# Altium PCB ZENDER.PcbDoc
Units mil, origin at the board's own origin, x right, y up, seen from the top; angles counter-clockwise.
Board outline 1955 x 1260 mil, 2 copper layers (Top Layer, Bottom Layer); 10 components, 46 nets, 36 pads, 3 vias.
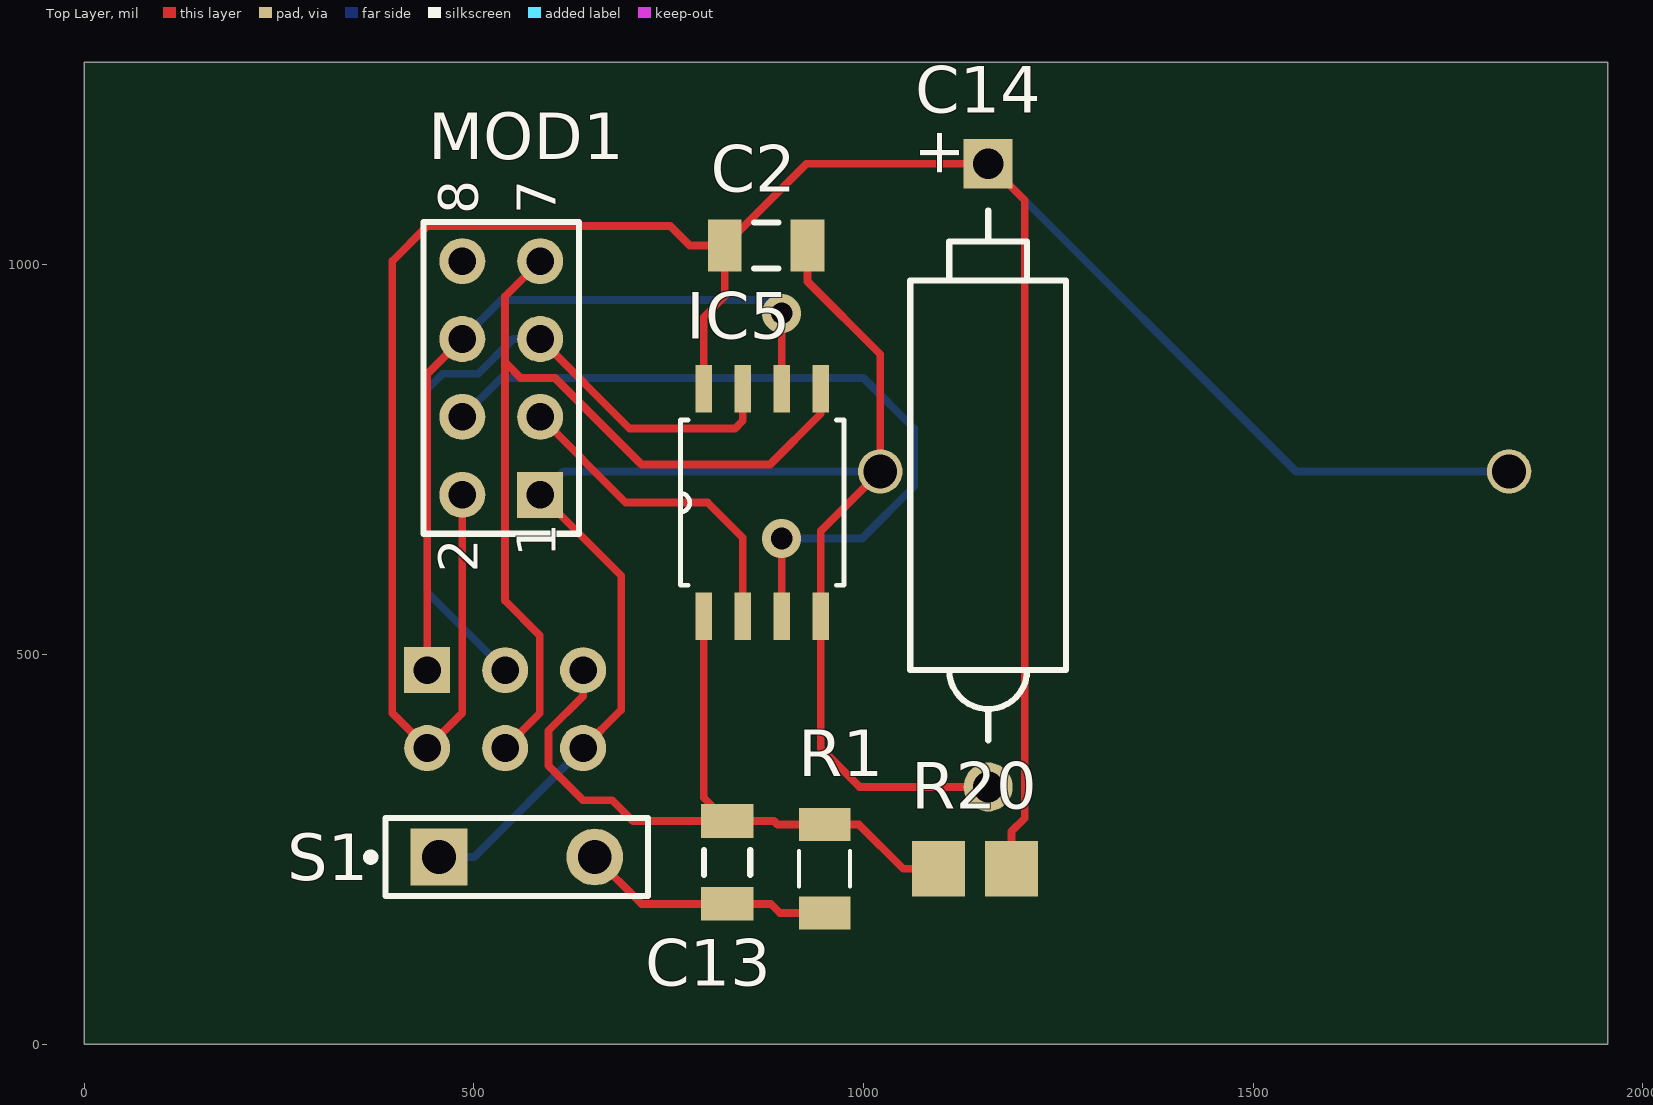
[diagram p0: Top Layer view]
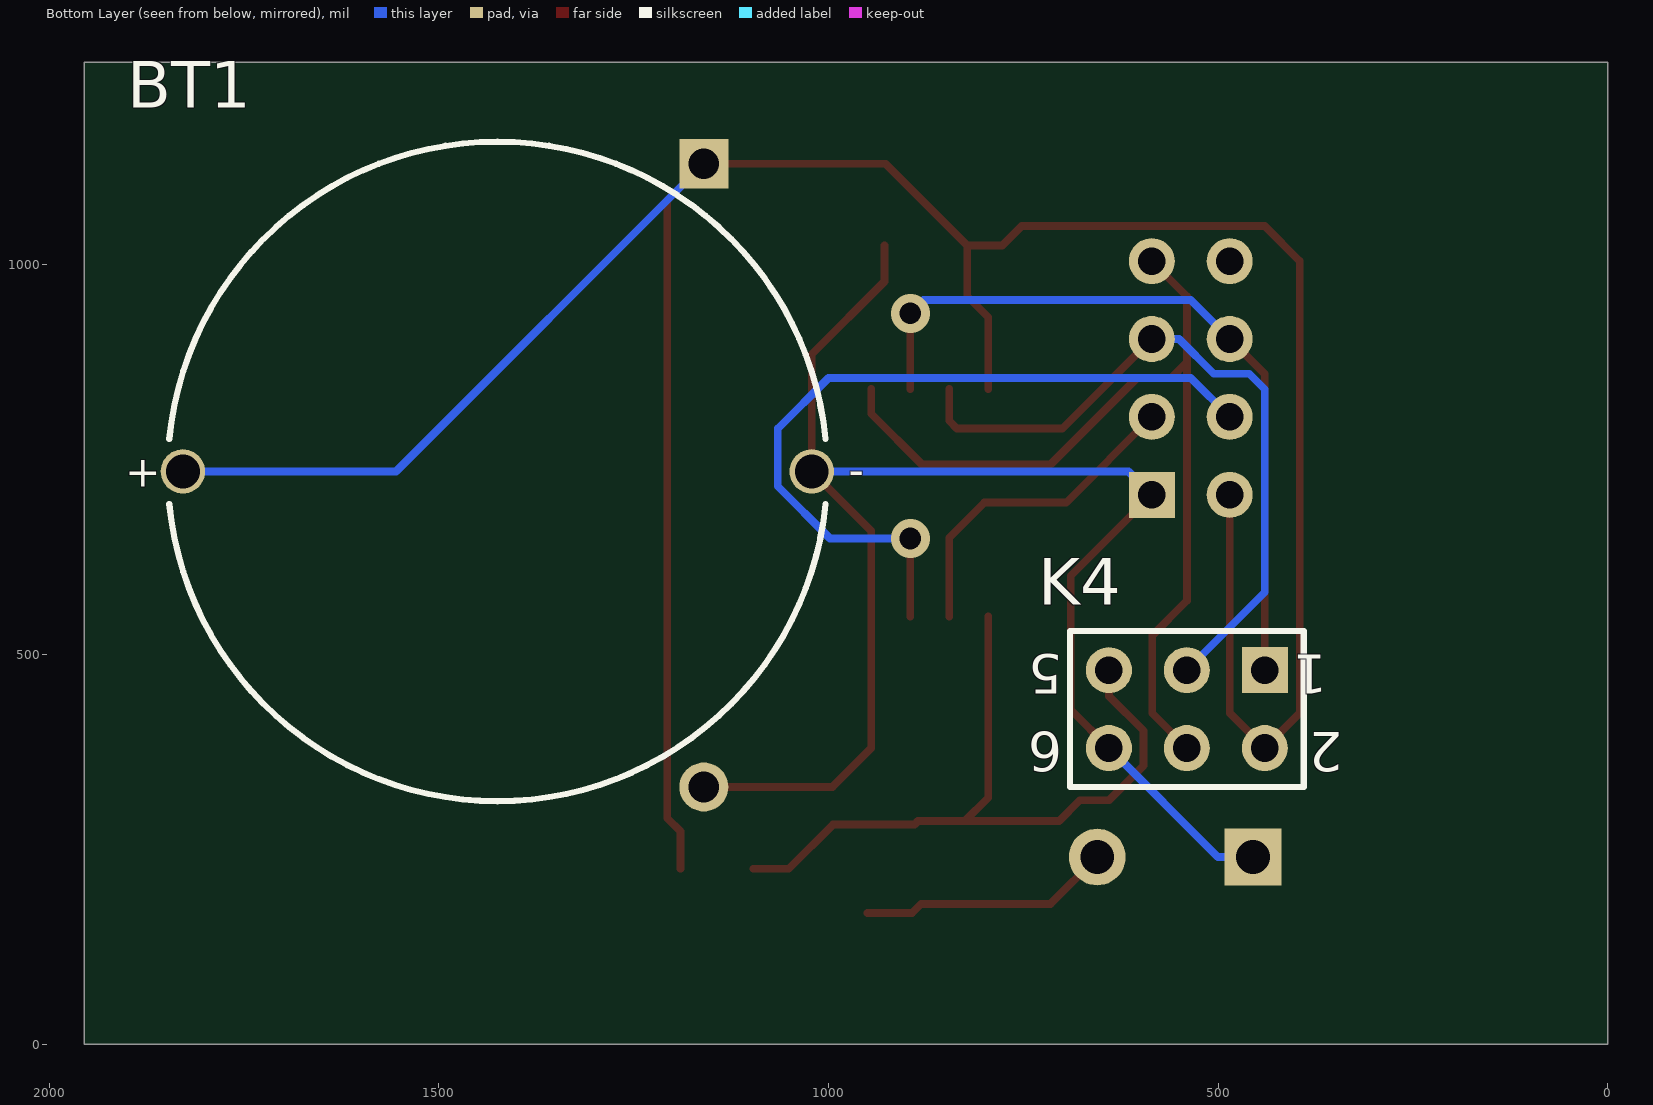
[diagram p1: Bottom Layer view, seen from below]

## Layer stack, top to bottom
Top Solder: solder mask 0.4, Solder Resist, Dk 3.5
Top Layer: signal copper 1.4
Dielectric 1: dielectric 12.6, FR-4, Dk 4.8
Bottom Layer: signal copper 1.4
Bottom Solder: solder mask 0.4, Solder Resist, Dk 3.5

## Board outline
0,0 1955,0 1955,1260 0,1260

## Design rules (kind name [scope] priority, off if disabled: settings)
Clearance [All] p1: gap=10 ignorepadtopadclearanceinfootprint=FALSE except(0: Arc-Hole Track-Hole SMDPad-Hole THPad-Hole Via-Hole Fill-Hole Poly-Hole Region-Hole Text-Hole)
PolygonConnect [All] p1: connectstyle=Relief reliefconductorwidth=10 reliefentries=4 polygonreliefangle="90 Angle" airgapwidth=10
RoutingVias [All] p1: holewidth=28 width=50 viastyle="Through Hole" minholewidth=28 minwidth=50 maxholewidth=28 maxwidth=50
SolderMaskExpansion [All] p1: expansion=4 istentingtop=FALSE
Width [All] p1: maxlimit=10 minlimit=10 preferedwidth=10
30 further rules are at their usual default settings.

## Components (designator, comment, footprint, x,y, rotation, side; value= is the part's Value field where it differs from the comment)
BT1 "CR-2032" PANA-CR-2032HFN 1425,735 r180 bottom
C2 "Cap Semi" C1206 875,1025 r180 top value=100nF
C13 "Cap Semi" C1206 825,233.15 r90 top value=100nF
C14 "Cap Pol2" POLAR0.8 1160,730 r90 top value=100nF
IC5 "ATtiny85" *SOIC127P798X216-8N 870,695 r90 top
K4 "ATMEL ISP" HDR2X3 440,480 r0 bottom
MOD1 "NRF24L01+" HDR2X4 585,705 r90 top
R1 "Res2" *RESC3115X70N 950,225 r270 top value=10K
R20 "Res2" *RESC3216X55N 1143.15,225 r180 top value=6k8
S1 "SW-PB" SPST-2 555,240 r0 top

## Footprints (in the part's own frame and the unit in brackets; to place one, negate y for a bottom-side part, rotate by r counter-clockwise, add the part's x,y. Pads: shape width x height; smd on the part's side, far side on the other; paste and mask are expansions set on the pad)
*RESC3115X70N [mm]
  rect 1.08x1.68 smd: 1(-1.445,0) 2(1.445,0)
  silkscreen extent -0.58,-0.83 0.58,0.83
*RESC3216X55N [mm]
  rect 1.74x1.82 smd: 1(-1.19,0) 2(1.19,0)
*SOIC127P798X216-8N [mil]
  rect 61x21 smd: 1(-146,75) 2(-146,25) 3(-146,-25) 4(-146,-75) 5(146,-75) 6(146,-25) 7(146,25) 8(146,75)
  silkscreen extent -106,-105 106,105
C1206 [mm] "Chip Capacitor, Body 3.2x1.6mm, IPC High Density"
  rect 1.1x1.7 smd: 1(-1.35,0) 2(1.35,0)
  silkscreen extent -0.4,-0.75 0.4,0.75, body extent -1.7,-0.9 1.7,0.9, height 1.3
HDR2X3 [mm] "Connector; Header; 3x2 Position"
  rect 1.5x1.5 hole 0.9: 1(0,0)
  round 1.5 hole 0.9: 2(0,2.54) 3(2.54,0) 4(2.54,2.54) 5(5.08,0) 6(5.08,2.54)
  silkscreen extent -1.27,-1.27 6.35,3.81
HDR2X4 [mm] "Connector; Header; 4x2 Position"
  rect 1.5x1.5 hole 0.9: 1(0,0)
  round 1.5 hole 0.9: 2(0,2.54) 3(2.54,0) 4(2.54,2.54) 5(5.08,0) 6(5.08,2.54) 7(7.62,0) 8(7.62,2.54)
  silkscreen extent -1.27,-1.27 8.89,3.81
PANA-CR-2032HFN [mm] "TH, 2-Leads, Dia 21.5mm"
  round 1.45 hole 1.1: 1(-10.25,0) 2(10.25,0)
  silkscreen extent -10.7,-10.75 10.7,10.75, body extent -10.75,-10.75 10.75,10.75, height 9.9
POLAR0.8 [mm] "Polarized Capacitor; 2 Leads"
  rect 1.6x1.6 hole 1: 1(10.16,0)
  round 1.6 hole 1: 2(-10.16,0)
  silkscreen extent -8.64,-2.54 8.64,2.54
SPST-2 [mm] "Switch; 2 Leads"
  rect 1.85x1.85 hole 1.1: 1(-2.54,0)
  round 1.85 hole 1.1: 2(2.54,0)
  silkscreen extent -4.89,-1.27 4.28,1.27

## Part data
BT1: library part CMP-2000-05296-1, "Coin Cell Battery, 225 mAh, 0.2 mA, 3 V, -30 to 60 degC, Bulk", Battery Capacity=220mAh, Battery Voltage=3V, Manufacturer=Panasonic, Battery IEC Code=CR2032, Battery NEDA Code=5004LC, Battery Size Code=2032, Battery Technology=LithiumManganeseDioxide, Battery Terminals=PCBPins, Datasheet URL=https://datasheet.ciiva.com/3/aaa4000de87-3072.pdf, Datasheet Version="Rev. 0, 05/2010", External Depth=-, External Diameter=20mm, External Height=3.2mm, External Width=-, Manufacturer URL=http://www.panasonic.com/, Product Range=-, SVHC=1,2-dimethoxyethane,ethyleneglycoldimethylether(EGDME)(15-Jun-2015), Weight=2.9g
C2 C13: "Capacitor (Semiconductor SIM Model)", LatestRevisionDate=29-May-2009, LatestRevisionNote="IPC-7351 Footprint Added.", PackageDescription="Chip Capacitor", PackageReference=C1206, Published=8-Jun-2000, Publisher="Altium Limited"
C14: "Polarized Capacitor (Axial)", LatestRevisionDate=17-Jul-2002, LatestRevisionNote="Re-released for DXP Platform.", PackageDescription="Polarized Capacitor; 2 Leads", PackageReference=POLAR0.8, Published=8-Jun-2000, Publisher="Altium Limited"
IC5: library part CMP-0093-00032-2, "8-bit AVR Microcontroller, 20MHz, 2.7-5.5V, 8K Flash, 512 Bytes EEPROM, 512 Bytes SRAM, Industrial Grade (-40°C to 85°C), 8-Lead PDIP, Pb-Free", Manufacturer="Microchip / Atmel", Manufacturer Part Number=ATTINY85-20PU, Code_JEDEC=MS-001-BA, ComponentLink1Description="Manufacturer URL", ComponentLink1URL=http://www.atmel.com/, ComponentLink2Description="ATtiny25/45/85 Datasheet", ComponentLink2URL=http://www.atmel.com/dyn/resources/prod_documents/doc2586.pdf, ComponentLink3Description="ATtiny25/45/85 Summary", ComponentLink3URL=http://www.atmel.com/dyn/resources/prod_documents/2586S.pdf, DatasheetVersion="revN, Apr-2011", PackageDescription="8-Lead, 0.300\" Wide Body, Plastic Dual In-Line Package (PDIP)", PackageReference=8P3, PackageVersion="revB, Jan-2002", RevisionNote="DatasheetVersion updated. URLs added."
K4: library part "Header 3X2", "Header, 3-Pin, Dual row", LatestRevisionDate=17-Jul-2002, LatestRevisionNote="Re-released for DXP Platform.", Publisher="Altium Limited"
MOD1: library part "Header 4X2", "Header, 4-Pin, Dual row", LatestRevisionDate=17-Jul-2002, LatestRevisionNote="Re-released for DXP Platform.", Publisher="Altium Limited"
R1 R20: "Resistor", LatestRevisionDate=17-Jul-2002, LatestRevisionNote="Re-released for DXP Platform.", PackageDescription="Axial Device, Thru-Hole; 2 Leads; 0.4 in Pin Spacing", PackageReference=AXIAL-0.4, Published=8-Jun-2000, Publisher="Altium Limited"
S1: "Switch", LatestRevisionDate=17-Jul-2002, LatestRevisionNote="Re-released for DXP Platform.", PackageDescription="Switch; 2 Leads", PackageReference=SPST-2, Published=24-Mar-1999, Publisher="Altium Limited"

## Via types
v1: diameter 50, hole 28, Top Layer to Bottom Layer, 3 vias

## Nets (pads, with @x,y where several pads share a name; then routed paths per layer and width w, separated by ;. In a path a pad name is that pad's centre, name@x,y a point inside that pad or via, vN(x,y) a via of type N, cw(c..) or ccw(c..) an arc to the next point about the centre after c; other vN are vias at no path point)
12V: 
+3V3:  | length 1240.3
  Bottom Layer w10: 2916,323 3793,-554
+5V:  | length 1275.6
  Bottom Layer w10: 2846,303 3748,-599
GND:  | length 1953.6
  Bottom Layer w10: 2709.37,273.43 4090.8,-1108
NetBT1_1: BT1.1 C2.2 C14.1 IC5.8 K4.2 MOD1.2 R20.1 | length 3783.6
  Top Layer w10: MOD1.2 485,425 K4.2 395,425 395,1005 440,1050 752,1050 777,1025 C2.2 ; IC5.8 795,933 821.85,959.85 C2.2 ; R20.1 1190,273 1207,290 1207,1083 C14.1 926.85,1130 C2.2
  Bottom Layer w10: C14.1 1555,735 BT1.1
NetBT1_2: BT1.2 C2.1 C14.2 IC5.4 K4.6 MOD1.1 S1.1 | length 2031.3
  Top Layer w10: MOD1.1 689,601 689,429 K4.6 ; C2.1 928.15,978.72 1021.46,885.42 BT1.2 945,658.54 IC5.4 945,380 995,330 C14.2
  Bottom Layer w10: S1.1 500,240 K4.6 ; MOD1.1 615,735 BT1.2
NetC3_2: 
NetC8_1: 
NetC9_2: 
NetC10_2: 
NetC12_1: 
NetC12_2: 
NetC13_1: C13.1 R1.2 S1.2 | length 324.8
  Top Layer w10: S1.2 715,180 C13.1 881,180 892.89,168.11 R1.2
NetC13_2: C13.2 IC5.1 K4.5 R1.1 R20.2 | length 971.8
  Top Layer w10: K4.5 640,446.53 595.47,402 595.47,357.53 640,313 677.3,313 704,286.3 C13.2 ; IC5.1 795,316.3 C13.2 ; R20.2 1050.89,225 994,281.89 R1.1 889.41,281.89 885,286.3 C13.2
NetD?_1: 
NetD?_2: 
NetIC3_OUT:  | length 2257.3
  Top Layer w10: 2709.37,175 2709.37,-1982.37 v1(2780,-2053)
NetIC4_2: 
NetIC4_3: 
NetIC4_4: 
NetIC4_5: 
NetIC4_11: 
NetIC4_12: 
NetIC4_13: 
NetIC4_14: 
NetIC4_15: 
NetIC4_17: 
NetIC4_18: 
NetIC4_19: 
NetIC4_28: 
NetIC5_2: IC5.2 MOD1.3 | length 425.2
  Top Layer w10: MOD1.3 695,695 800,695 845,650 IC5.2
NetIC5_3: IC5.3 MOD1.4 | length 999.4
  Top Layer w10: IC5.3 v1(895,649)
  Bottom Layer w10: MOD1.4 535,855 1000,855 1065,790 1065,716 998,649 v1(895,649)
NetIC5_5: IC5.5 K4.4 MOD1.7 | length 1198.7
  Top Layer w10: K4.4 584.53,424.53 584.53,524.53 540,569.06 540,875 ; MOD1.7 540,960 540,875 ; IC5.5 945,809 880,744 715,744 604,855 560,855 540,875
NetIC5_6: IC5.6 K4.1 MOD1.6 | length 978.4
  Top Layer w10: K4.1 440,860 MOD1.6 ; IC5.6 v1(895,938)
  Bottom Layer w10: MOD1.6 535,955 878,955 v1(895,938)
NetIC5_7: IC5.7 K4.3 MOD1.5 | length 926.4
  Top Layer w10: MOD1.5 700,790 835,790 845,800 IC5.7
  Bottom Layer w10: K4.3 440,580 440,840.47 460,860.47 505.47,860.47 550,905 MOD1.5
NetIR?_1: 
NetJP1_1: 
NetJP?_1: 
NetK3_2: 
NetK3_3: 
NetK3_4: 
NetLS?_1: 
NetR6_1: 
NetR8_1: 
NetR10_1: 
NetR15_1: 
pads on no net: MOD1.8

## Text inside footprints (layer, text, board x,y; h text height)
BT1: Mechanical 5 "+" at 1902.56,715.31 h40; Mechanical 5 "-" at 974.09,717.28 h40; Bottom Overlay "+" at 1902.56,715.31 h40; Bottom Overlay "-" at 974.09,717.28 h40
C14: Top Overlay "+" at 1122.6,1110 h59.06 r90
K4: Bottom Overlay "6" at 700,400 h50 r180; Bottom Overlay "5" at 700,500 h50 r180; Bottom Overlay "2" at 340,400 h50 r180; Bottom Overlay "1" at 360,500 h50 r180
MOD1: Top Overlay "2" at 505,605 h50 r90; Top Overlay "1" at 605,625 h50 r90; Top Overlay "7" at 605,1065 h50 r90; Top Overlay "8" at 505,1065 h50 r90